# Altium PCB punto5pcb.PcbDoc
Units mm, origin at the board's own origin, x right, y up, seen from the top; angles counter-clockwise.
Board outline 50 x 50 mm, 2 copper layers (Top Layer, Bottom Layer); 28 components, 14 nets, 64 pads, 0 vias.
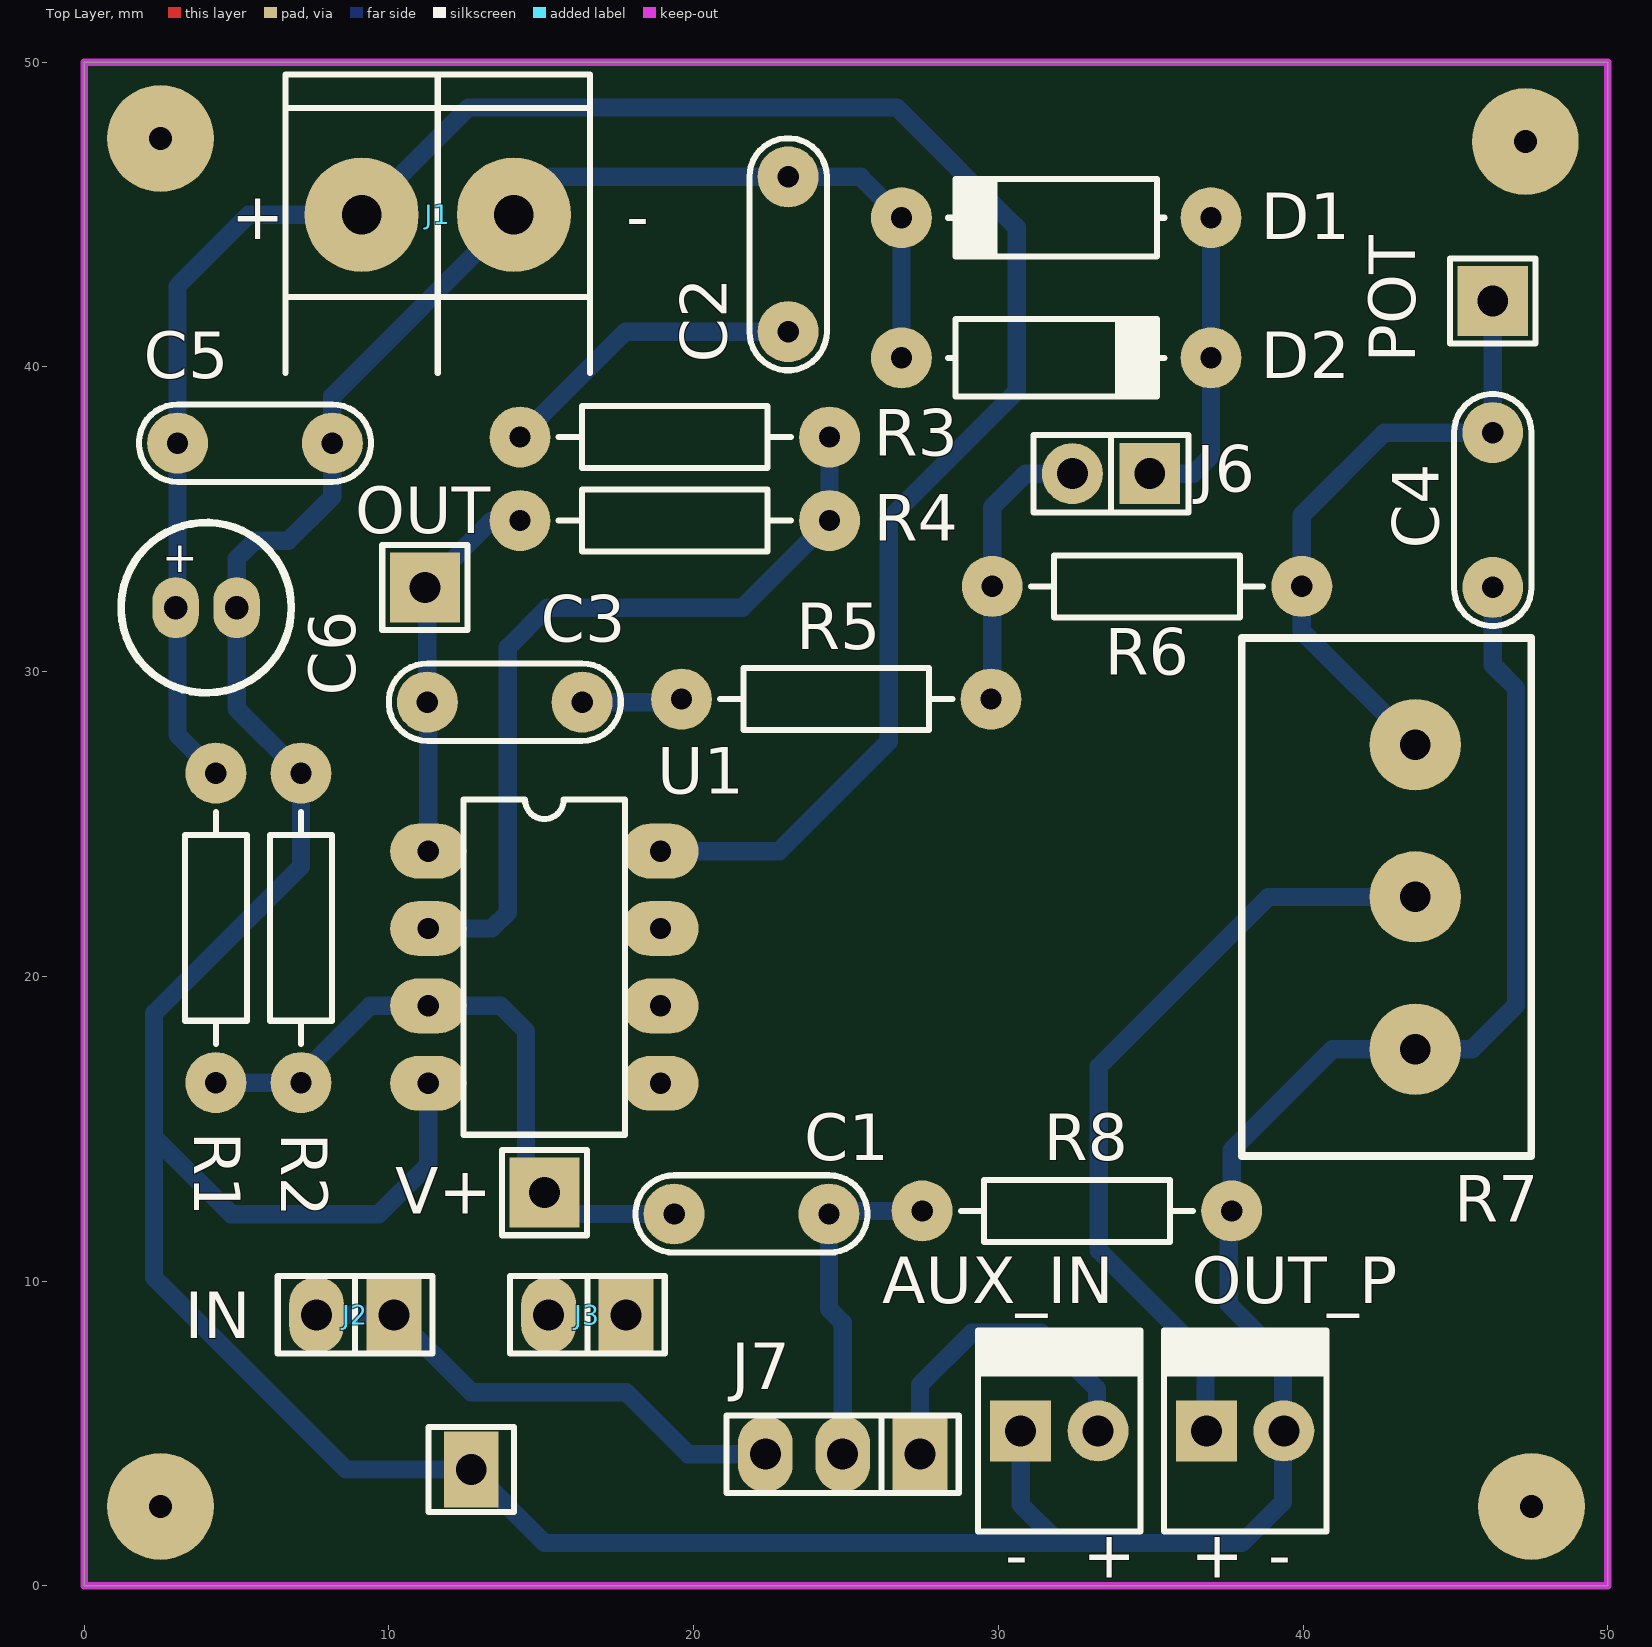
[diagram p0: Top Layer view]
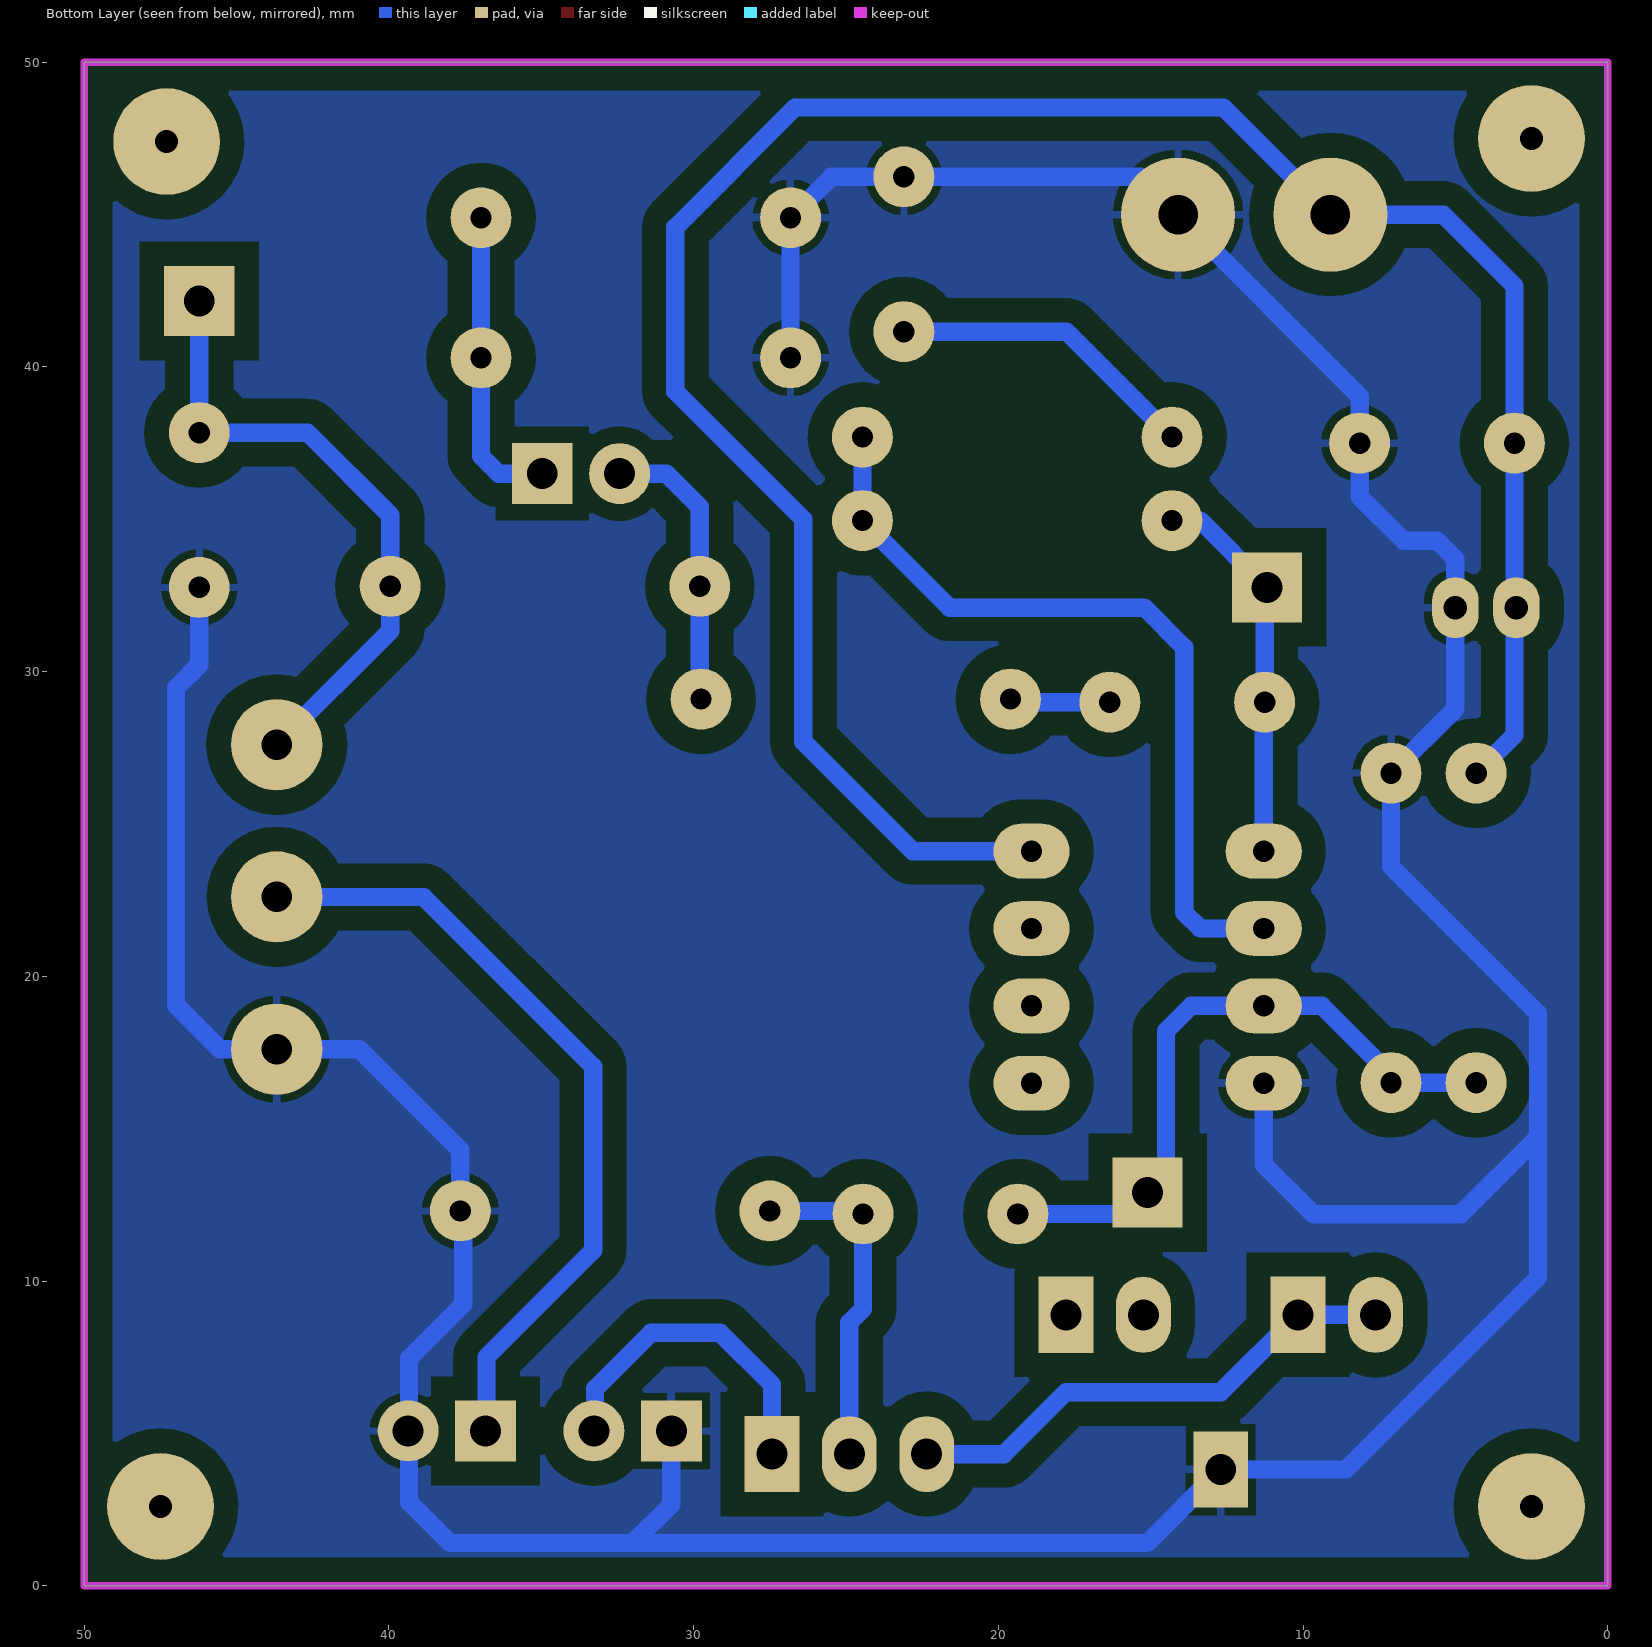
[diagram p1: Bottom Layer view, seen from below]
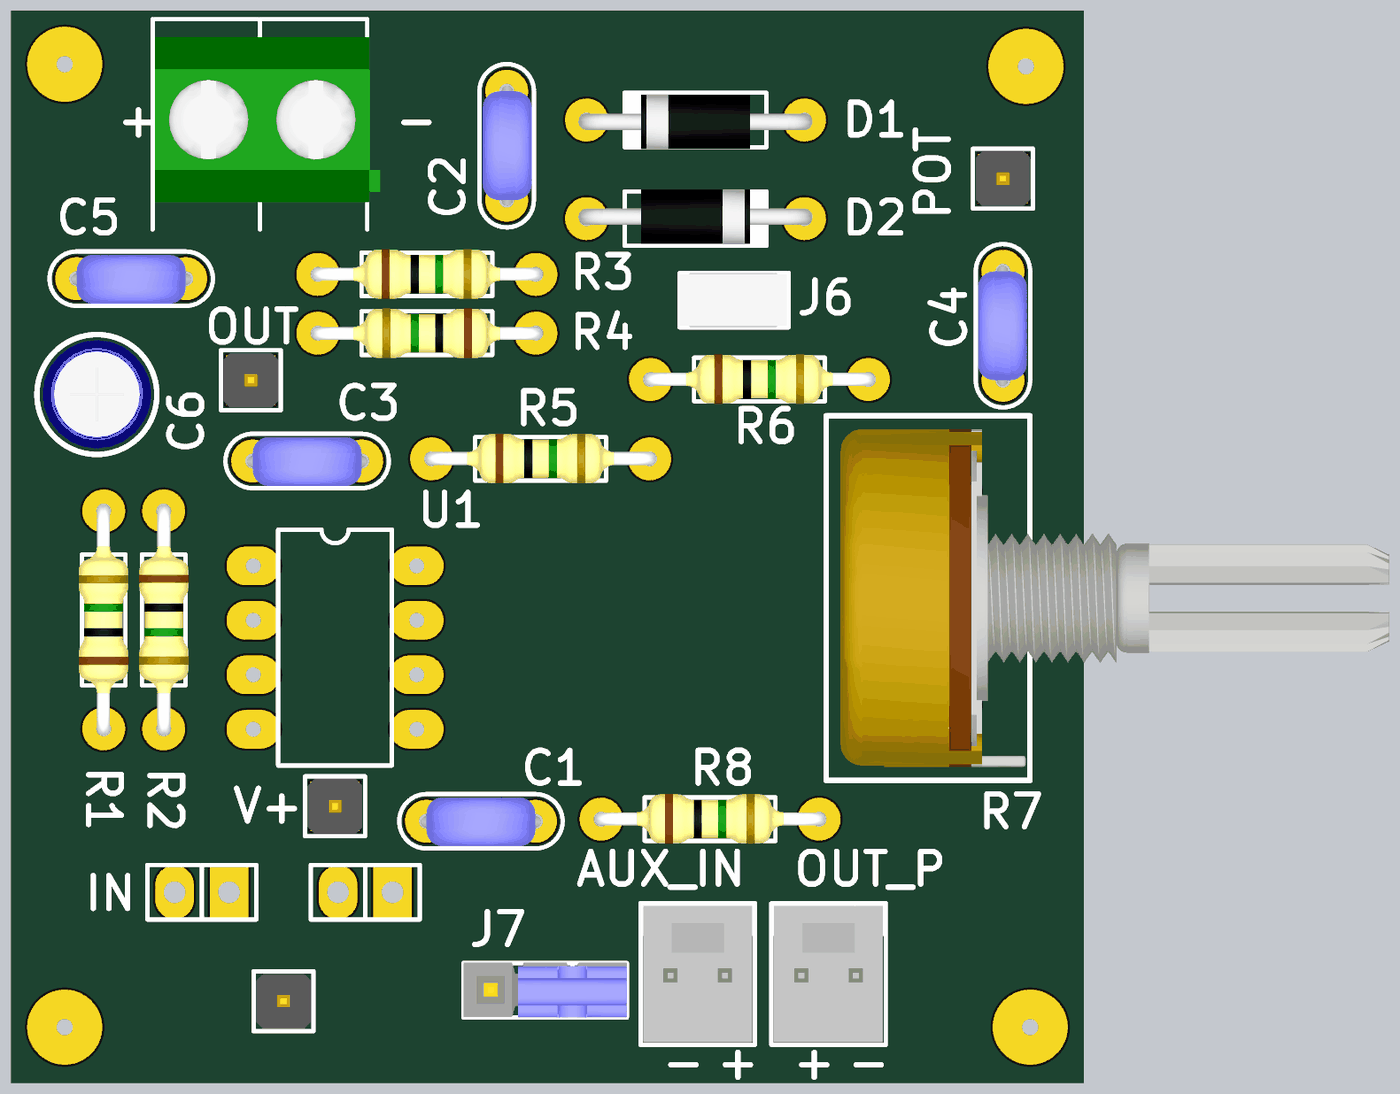
[diagram p2: 3D render of the assembled board from above, using the file's embedded part models]

## Layer stack, top to bottom
Top Solder: solder mask 0.0102, Solder Resist, Dk 3.5
Top Layer: signal copper 0.0356
Dielectric 1: dielectric 0.32, FR-4, Dk 4.8
Bottom Layer: signal copper 0.0356
Bottom Solder: solder mask 0.0102, Solder Resist, Dk 3.5

## Board outline
0,0 0,50 50,50 50,0 0,0

## Design rules (kind name [scope] priority, off if disabled: settings)
Clearance [All] p1: gap=0.3
PolygonConnect [All] p1: connectstyle=Relief reliefconductorwidth=0.254 reliefentries=4 polygonreliefangle="90 Angle" airgapwidth=0.254
RoutingVias [All] p1: holewidth=0.4 width=2 viastyle="Through Hole" minholewidth=0.4 minwidth=2 maxholewidth=0.4 maxwidth=2
SolderMaskExpansion [All] p1: expansion=0.102
Width [All] p1: maxlimit=0.6 minlimit=0.6 preferedwidth=0.6
30 further rules are at their usual default settings.

## Components (designator, comment, footprint, x,y, rotation, side; value= is the part's Value field where it differs from the comment)
AUX_IN "MOLEX2" MOLEX2 30.734,5.08 r0 top (schematic designator J4)
C1 "CAP" CAP200 21.9,12.2 r0 top
C2 "CAP" CAP200 23.1,43.7 r90 top
C3 "CAP" CAP200 13.8,29 r0 top
C4 "CAP" CAP200 46.228,35.306 r270 top
C5 "CAP" CAP200 5.6,37.5 r0 top
C6 "CAPPOL" CAP100RP 4,32.1 r0 top
D1 "DIODO" DO41 31.9,44.9 r180 top
D2 "DIODO" DO41 31.9,40.3 r0 top
IN "TP" TPTH#1 12.7,3.81 r90 top (schematic designator TPGND)
J1 "BORNERA 2" BORNERA2 11.6,45 r270 top
J2 "CON2" SIP2 8.89,8.89 r180 top
J3 "CON2" SIP2 16.51,8.89 r180 top
J6 "JUMPER" JUMPER2 33.7,36.5 r180 top
J7 "JUMPER" JUMPER3 24.892,4.318 r180 top
OUT "TP" TPTH#2 11.176,32.766 r90 top (schematic designator OUT_OP)
OUT_P "MOLEX2" MOLEX2 36.83,5.08 r0 top (schematic designator J5)
POT "TP" TPTH#2 46.228,42.164 r270 top
R1 "RES" RES400 4.318,16.51 r90 top
R2 "RES" RES400 7.112,26.67 r270 top
R3 "RES" RES400 14.3,37.7 r0 top
R4 "RES" RES400 24.46,34.96 r180 top
R5 "RES" RES400 19.6,29.1 r0 top
R6 "RES" RES400 29.8,32.8 r0 top
R7 "POTENCIOMETRO" POTENCIOMETRO 43.688,22.606 r90 top
R8 "RES" RES400 27.5,12.3 r0 top
U1 "TL082P" P008 15.1,20.3 r270 top
V+ "TP" TPTH#2 15.1,12.9 r0 top

## Footprints (in the part's own frame and the unit in brackets; to place one, negate y for a bottom-side part, rotate by r counter-clockwise, add the part's x,y. Pads: shape width x height; smd on the part's side, far side on the other; paste and mask are expansions set on the pad)
BORNERA2 [mm] "Bornera con Tornillos 5mm separación"
  round 3.75 hole 1.3: 1(0,2.5) 2(0,-2.5)
  silkscreen extent -4.6,-5 5.2,5, body extent -3.76,-4.89 3.94,5.61, height 10
CAP100RP [mm] "Body diameter 5mm"
  oval 1.524x2 hole 0.762: 1(-1,0) 2(1,0)
  silkscreen extent -2.79,-2.79 2.79,2.79, body extent -2.53,-2.51 2.53,2.54, height 11.53
CAP200 [mm]
  round 2 hole 0.7: 1(-2.54,0) 2(2.54,0)
  silkscreen extent -3.81,-1.27 3.81,1.27, body extent -2.79,-1.17 2.79,1.12, height 6.24
DO41 [mm]
  round 2 hole 0.7: 1(-5.08,0) 2(5.08,0)
  silkscreen extent -3.56,-1.27 3.56,1.27, body extent -5.46,-1.19 5.46,1.37, height 2.03
JUMPER2 [mm]
  rect 2x2 hole 1.016: 1(-1.27,0)
  round 2 hole 1.016: 2(1.27,0)
  silkscreen extent -2.54,-1.27 2.54,1.27, body extent -2.46,-1.27 2.54,1.27, height 9.5
JUMPER3 [mm]
  rect 1.8x2.5 hole 1.016: 1(-2.54,0)
  oval 1.8x2.5 hole 1.016: 2(0,0) 3(2.54,0)
  silkscreen extent -3.81,-1.27 3.81,1.27, body extent -3.81,-1.3 3.81,1.27, height 16.15
MOLEX2 [mm]
  rect 2x2 hole 1.016: 1(0,0)
  round 2 hole 1.016: 2(2.54,0)
  silkscreen extent -1.4,-3.3 3.94,3.3, body extent -1.27,-3.17 3.81,3.17, height 10.74
P008 [mm] "DIP; 8 Leads; Row Spacing 7.62 mm; Pitch 2.54 mm"
  oval 1.8x2.5 hole 0.7: 1(-3.81,-3.81) 2(-1.27,-3.81) 3(1.27,-3.81) 4(3.81,-3.81) 5(3.81,3.81) 6(1.27,3.81) 7(-1.27,3.81) 8(-3.81,3.81)
  silkscreen extent -5.5,-2.65 5.5,2.65
POTENCIOMETRO [mm]
  round 3 hole 1: 1(-5,0) 2(0,0) 3(5,0)
  silkscreen extent -8.5,-3.8 8.5,5.7, body extent -7.87,-20.53 7.87,5.03, height 20.12
RES400 [mm]
  round 2 hole 0.7: 1(0,0) 2(10.16,0)
  silkscreen extent 1.27,-1.02 8.89,1.02, body extent -0.3,-1.14 10.46,1.17, height 2.43
SIP2 [mm]
  rect 1.8x2.5 hole 1.016: 1(-1.27,0)
  oval 1.8x2.5 hole 1.016: 2(1.27,0)
  silkscreen extent -2.54,-1.27 2.54,1.27
TPTH#1 [mm]
  rect 2.5x1.8 hole 1.016: 1(0,0)
  silkscreen extent -1.4,-1.4 1.4,1.4, body extent -1.27,-1.27 1.27,1.27, height 6.04
TPTH#2 [mm]
  rect 2.3x2.3 hole 1.016: 1(0,0)
  silkscreen extent -1.4,-1.4 1.4,1.4, body extent -1.27,-1.27 1.27,1.27, height 6.04

## Part data
J7: library part JUMPER3
U1: "JFET-Input Operational Amplifier"

## Free pads (board coordinates)
  round 3.5 hole 0.762: 0(2.5,2.6) 0(2.5,47.5) 0(47.3,47.4) 0(47.5,2.6)

## Nets (pads, with @x,y where several pads share a name; then routed paths per layer and width w, separated by ;. In a path a pad name is that pad's centre, name@x,y a point inside that pad or via, vN(x,y) a via of type N, cw(c..) or ccw(c..) an arc to the next point about the centre after c; other vN are vias at no path point)
GND: AUX_IN.1 C2.2 C4.2 C5.2 C6.2 D1.2 D2.1 IN.1 J1.1 OUT_P.2 R2.1 R7.1 R8.2 U1.4 | length 157
  Bottom Layer w0.6: U1.4 11.29,13.83 9.652,12.192 4.826,12.192 2.286,14.732 ; D2.1 D1.2 25.48,46.24 C2.2 15.34,46.24 J1.1 8.14,39.04 C5.2 8.14,35.74 6.7,34.3 5.6,34.3 5,33.7 C6.2 5,28.782 R2.1 7.112,23.612 2.286,18.786 2.286,14.732 ; AUX_IN.1 30.734,2.67 32.004,1.4 ; R8.2@37.56,12.3 37.56,9.24 39.34,7.46 39.34,2.74 38,1.4 32.004,1.4 ; R8.2 37.66,14.292 40.974,17.606 R7.1 45.546,17.606 46.99,19.05 46.99,29.464 46.228,30.226 C4.2 ; 2.286,14.732 2.286,10.114 8.59,3.81 IN.1 15.11,1.4 32.004,1.4
NetC1_1: C1.1 R1.1 R2.2 U1.3 V+.1 | length 21.8
  Bottom Layer w0.6: R1.1 R2.2 7.112,16.764 9.378,19.03 U1.3 13.67,19.03 14.5,18.2 14.5,13.6 15.9,12.2 C1.1 ; R2.2@6.96,17.1 R2.2@7,17.14
NetC1_2: C1.2 J7.2 R8.1 | length 11.2
  Bottom Layer w0.6: J7.2 24.892,8.636 24.44,9.088 C1.2 24.54,12.3 R8.1
NetC2_1: C2.1 R3.1 | length 10.2
  Bottom Layer w0.6: R3.1 17.76,41.16 C2.1
NetC3_1: C3.1 OUT.1 R4.2 U1.1 | length 12.7
  Bottom Layer w0.6: C3.1 11.26,32.682 OUT.1 13.37,34.96 R4.2 ; U1.1 C3.1@11.29,28.97
NetC3_2: C3.2 R5.1 | length 3.2
  Bottom Layer w0.6: C3.2 R5.1@19.5,29
NetC4_1: C4.1 POT.1 R6.2 R7.3 | length 20.8
  Bottom Layer w0.6: R7.3 39.96,31.334 R6.2 39.96,35.134 42.672,37.846 C4.1 POT.1
NetD1_1: D1.1 D2.2 J6.1 | length 10.1
  Bottom Layer w0.6: J6.1 36.4,36.5 36.98,37.08 D2.2 D1.1
NetJ4_2: AUX_IN.2 J7.1 | length 10.9
  Bottom Layer w0.6: J7.1 27.432,6.604 29.128,8.3 31.4,8.3 33.24,6.46 AUX_IN.2@33.24,5.08
NetJ5_1: OUT_P.1 R7.2 | length 26.1
  Bottom Layer w0.6: OUT_P.1@36.8,5.08 36.8,7.5 33.3,11 33.3,17.044 38.862,22.606 R7.2
NetJ6_2: J6.2 R5.2 R6.1 | length 9.4
  Bottom Layer w0.6: R5.2 29.8,29.14 R6.1 29.8,35.4 30.9,36.5 J6.2
NetR3_2: R3.2 R4.1 U1.2 | length 26.6
  Bottom Layer w0.6: U1.2 13.37,21.57 13.9,22.1 13.9,30.8 15.2,32.1 21.6,32.1 R4.1 R3.2
SIGNAL_IN: J2.1 J2.2 J7.3 | length 16.6
  Bottom Layer w0.6: J2.2 J2.1 12.7,6.35 17.78,6.35 19.812,4.318 J7.3
VCC: C5.1 C6.1 J1.2 R1.2 U1.8 | length 75.7
  Bottom Layer w0.6: R1.2 3.06,27.928 C5.1 3.06,42.66 5.4,45 J1.2 12.614,48.514 26.67,48.514 30.6,44.584 30.6,39.2 26.4,35 26.4,27.7 22.81,24.11 U1.8
pads on no net: J3.1 J3.2 U1.5 U1.6 U1.7

## Polygon pours and split planes (outlines as drawn)
GND on Bottom Layer "Bottom Layer-No Net" (solid, remove dead copper, pour order 4): 0,50 50,50 50,0 0,0

## Keep-outs
Keep-Out Layer:
  the board outline again, w0.254

## Silkscreen, mask and mechanical layers (free items; w line width, h text height)
Top Overlay:
  text "+" at 4.826,44.196 h1.52
  text "-" at 17.78,44.196 h1.52
  text "-" at 30.226,0.254 h1.52
  text "+" at 32.766,0.254 h1.52
  text "+" at 36.322,0.254 h1.52
  text "-" at 38.862,0.254 h1.52

## Text inside footprints (layer, text, board x,y; h text height)
C6: Top Overlay "+" at 2.552,33.268 h1.02